# Altium PCB LittleWing++.PcbDoc (part 1 of 2)
Units mil, origin at the board's own origin, x right, y up, seen from the top; angles counter-clockwise.
Board outline 4200 x 2200 mil, 6 copper layers (L1 - Signal, L2 - Ground, L3 - Power, L4 - Signal, L5 - Ground, L6 - Signal), stack 60.567 mil thick; 70 components, 84 nets, 372 pads, 438 vias.
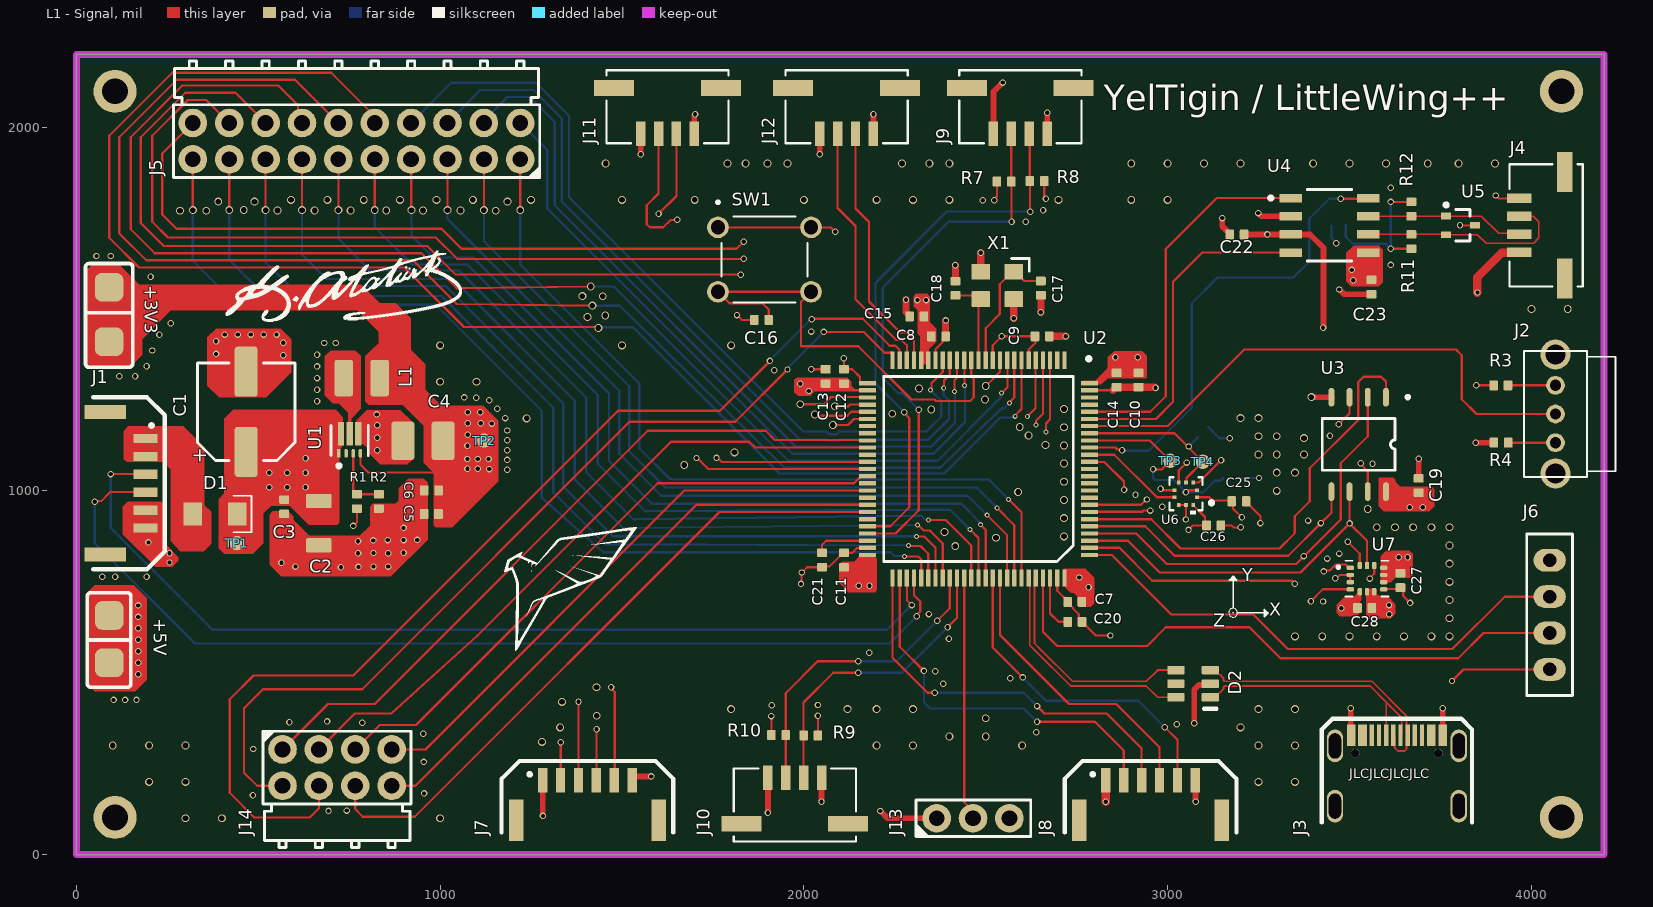
[diagram p0: L1 - Signal view]
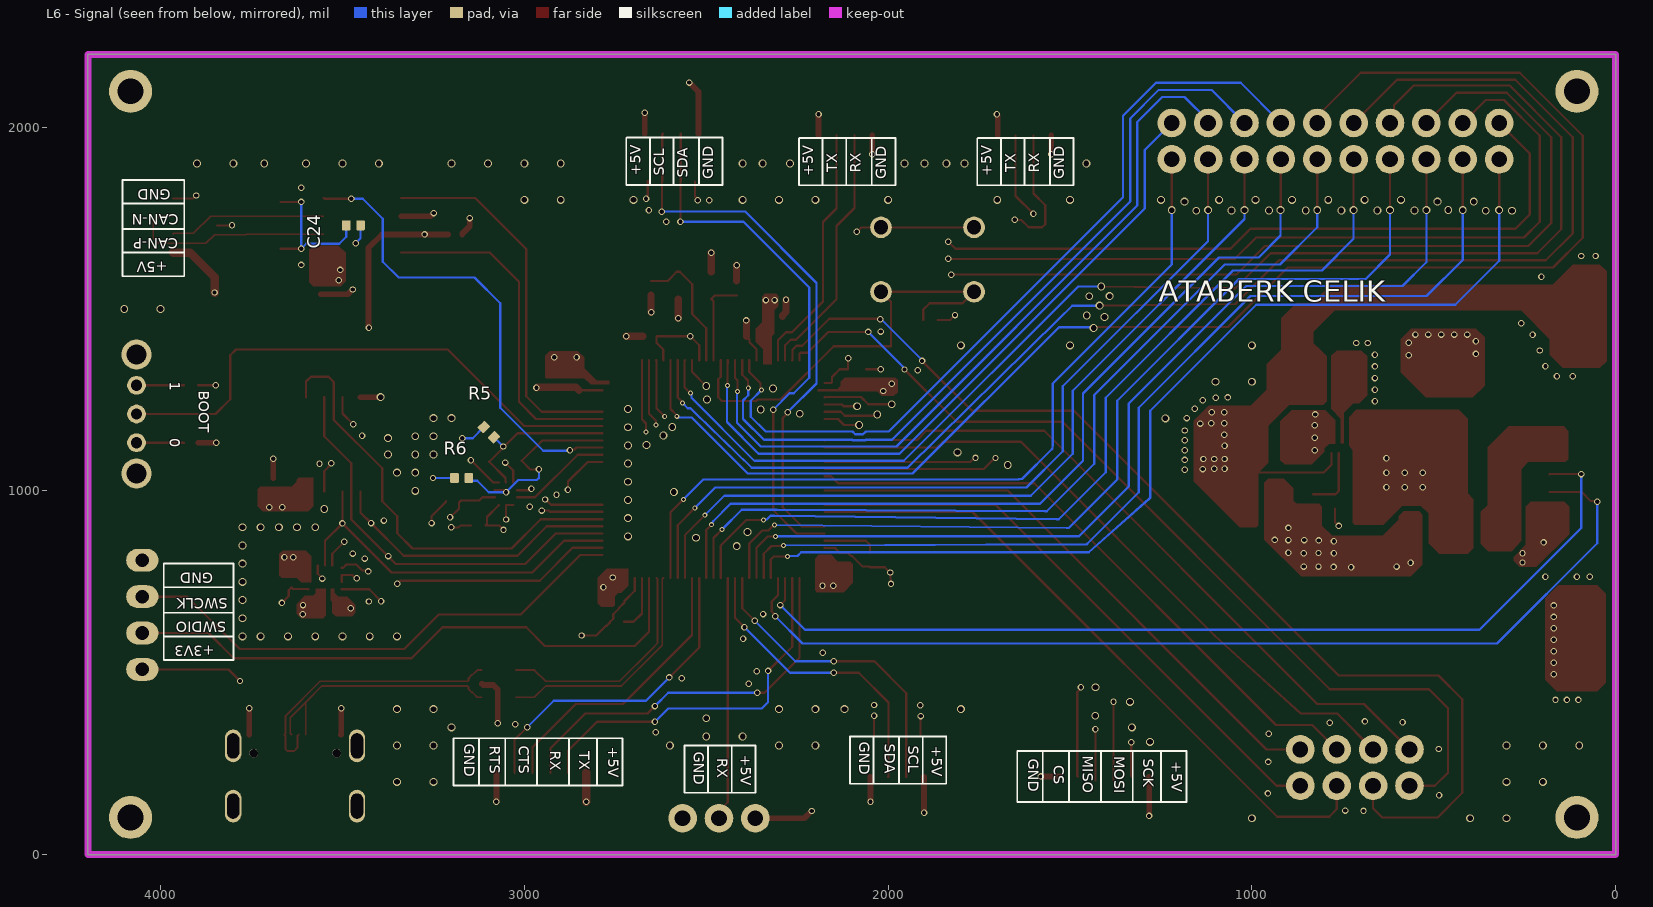
[diagram p1: L6 - Signal view, seen from below]
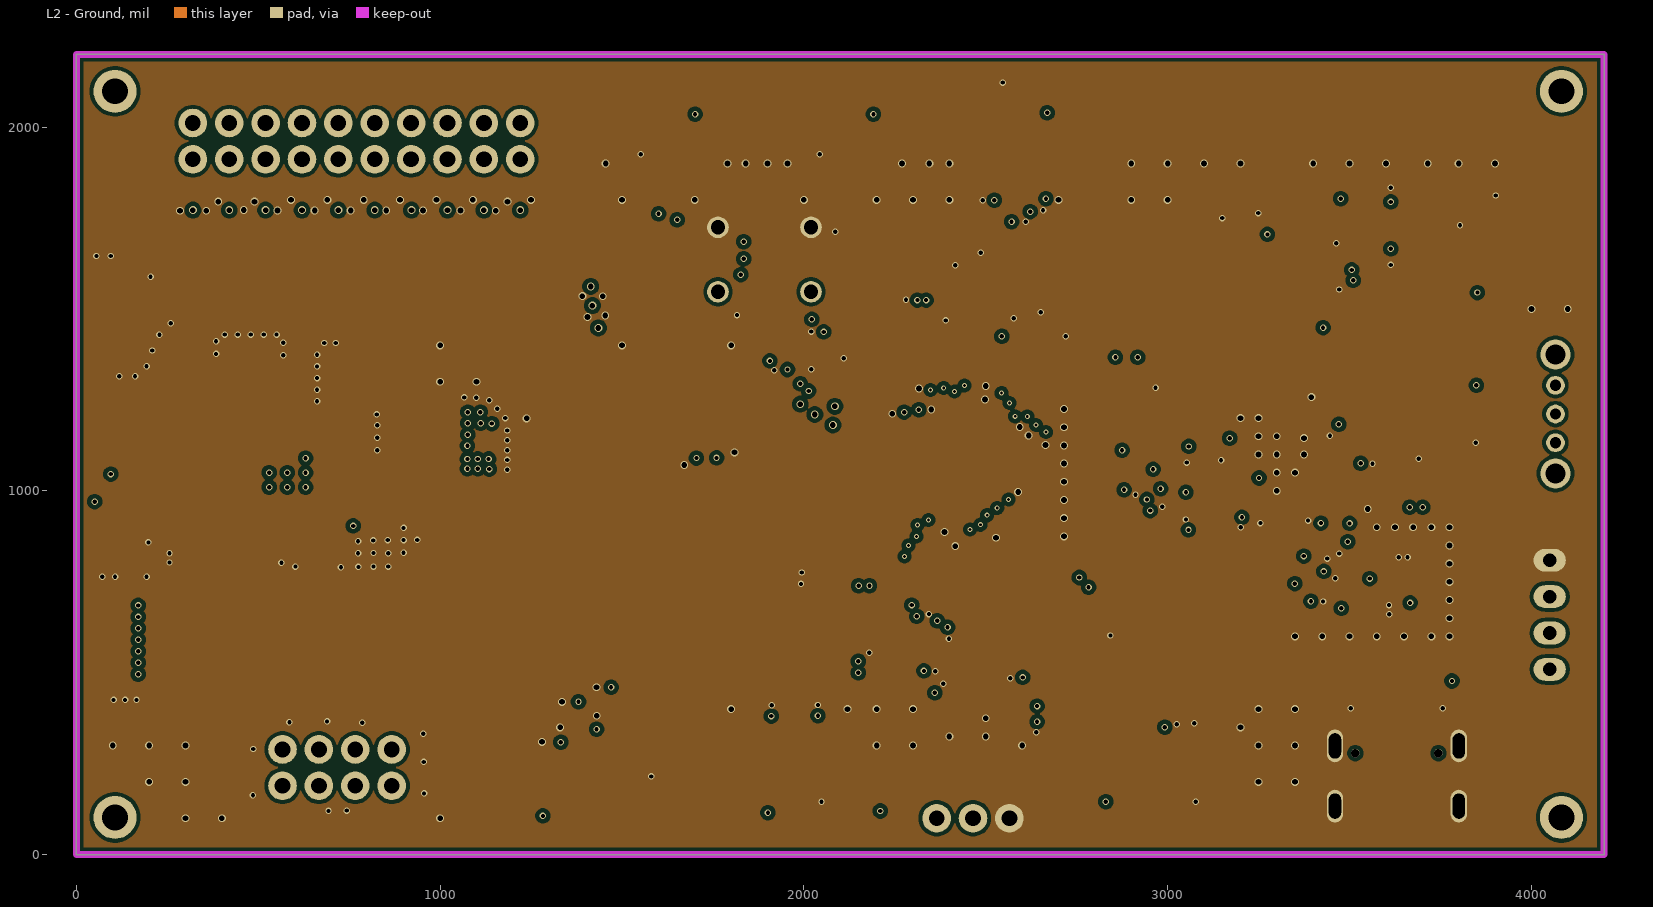
[diagram p2: L2 - Ground]
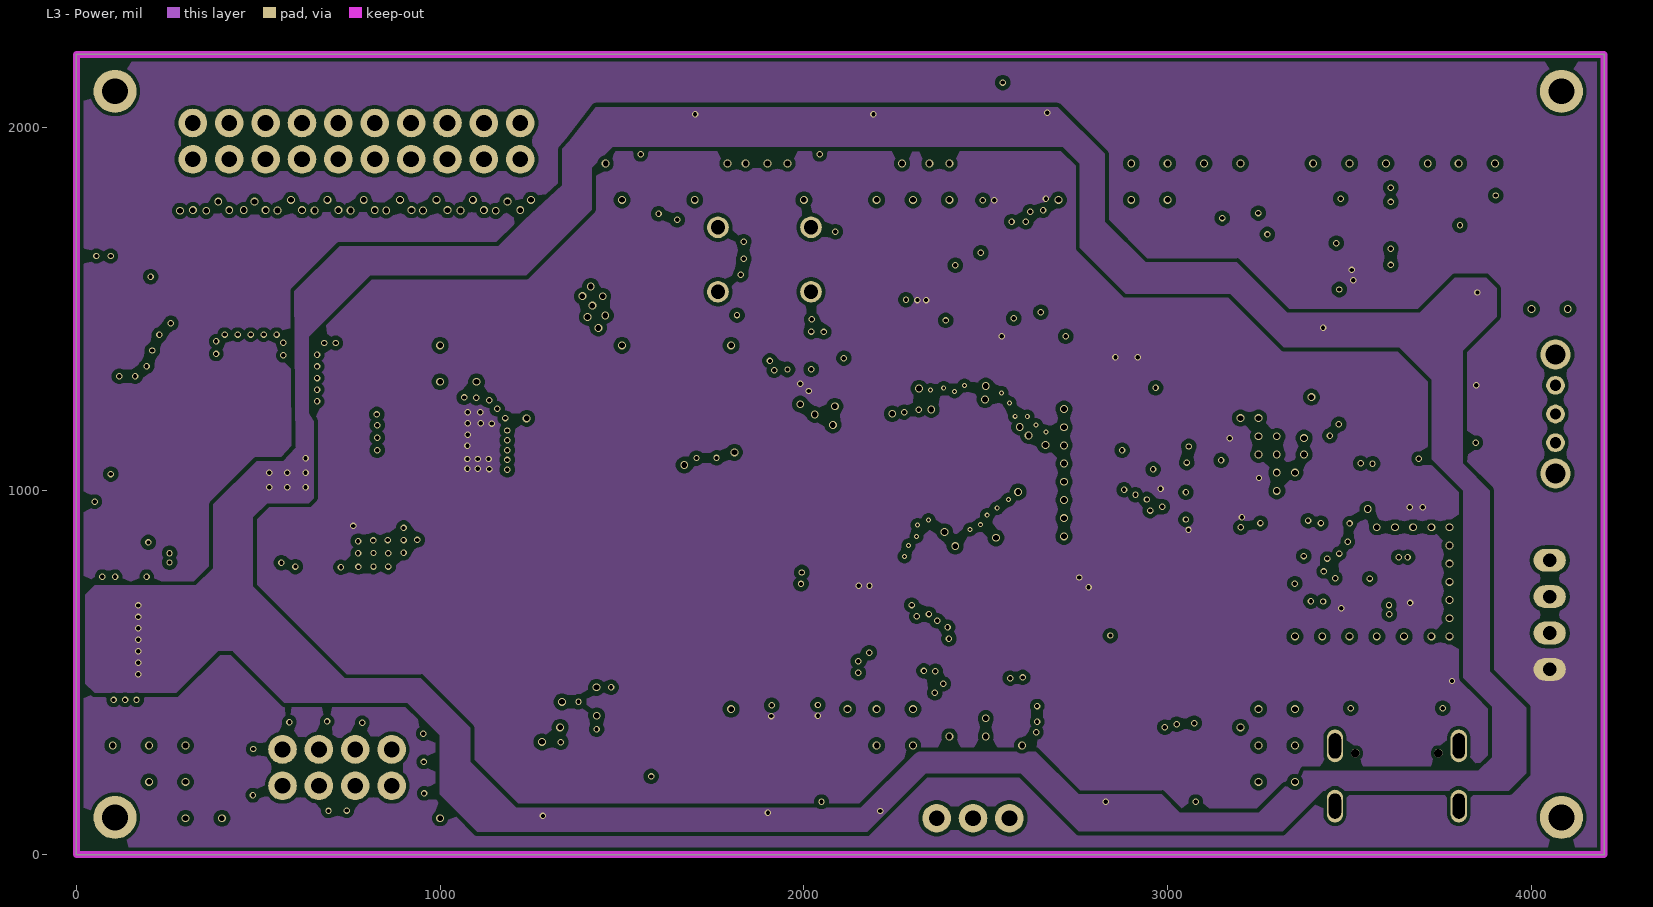
[diagram p3: L3 - Power]
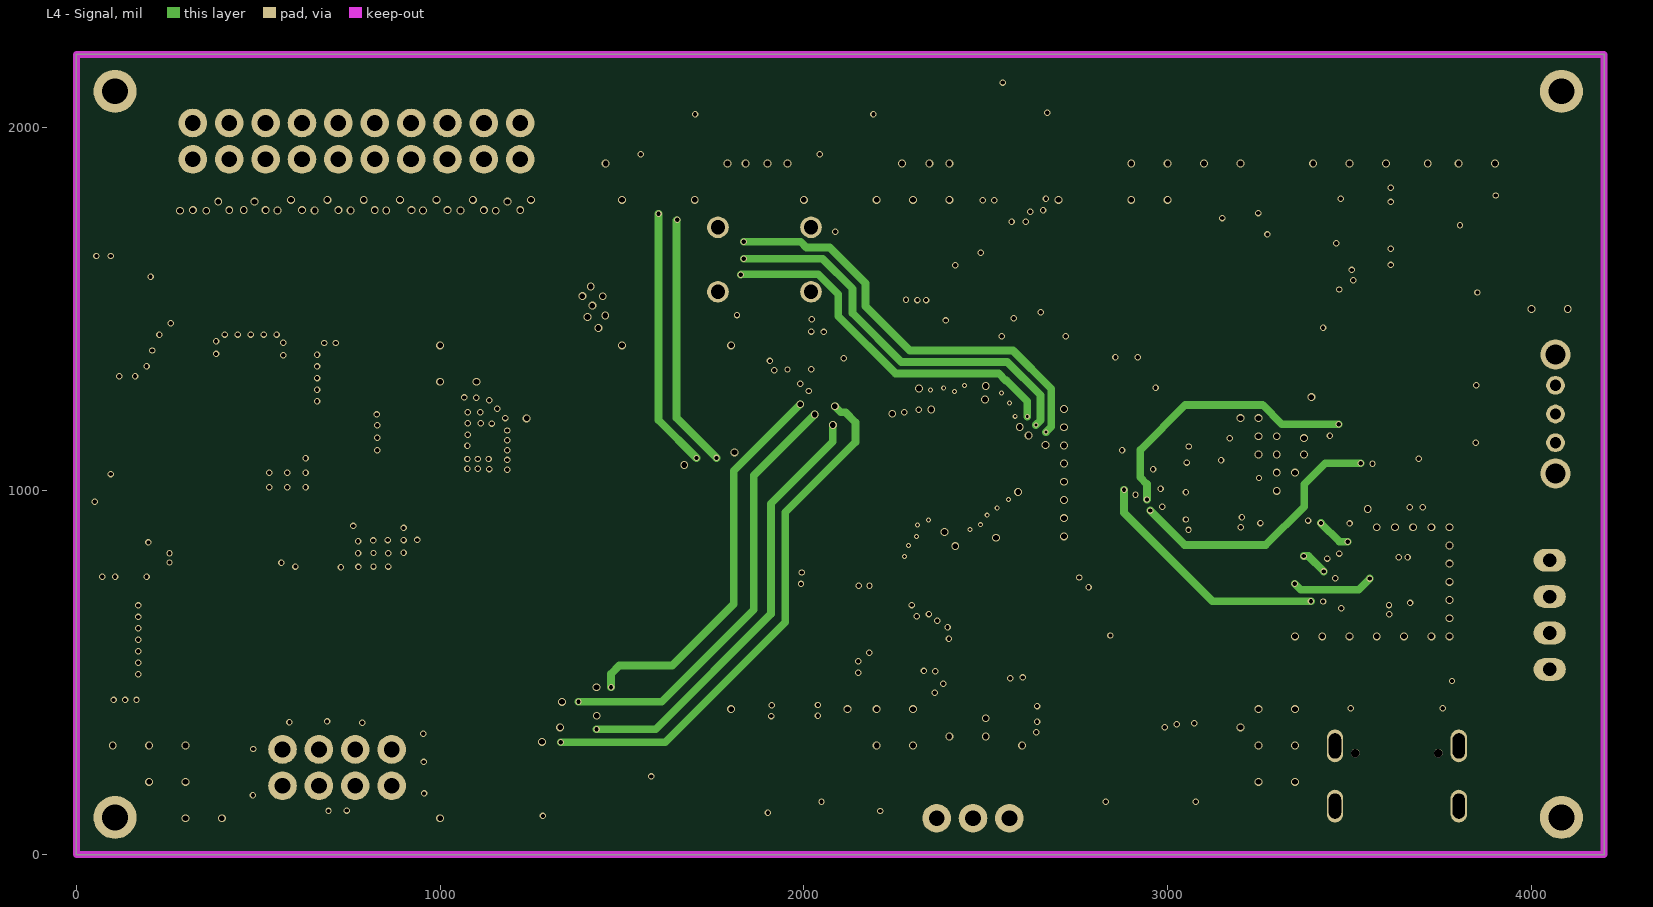
[diagram p4: L4 - Signal]
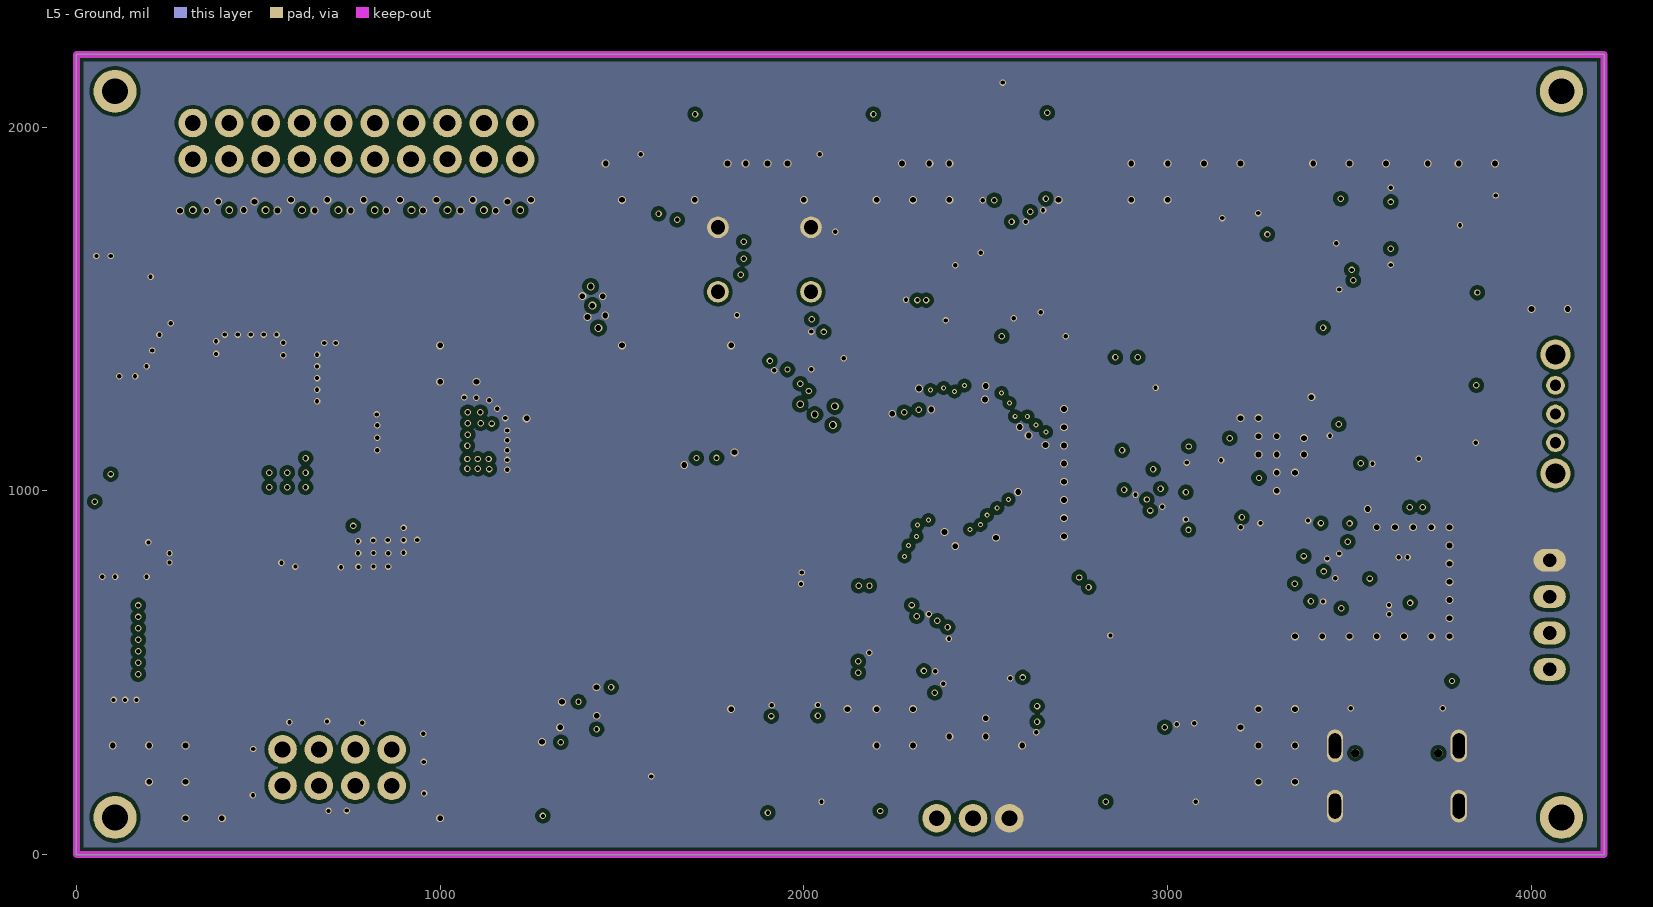
[diagram p5: L5 - Ground]
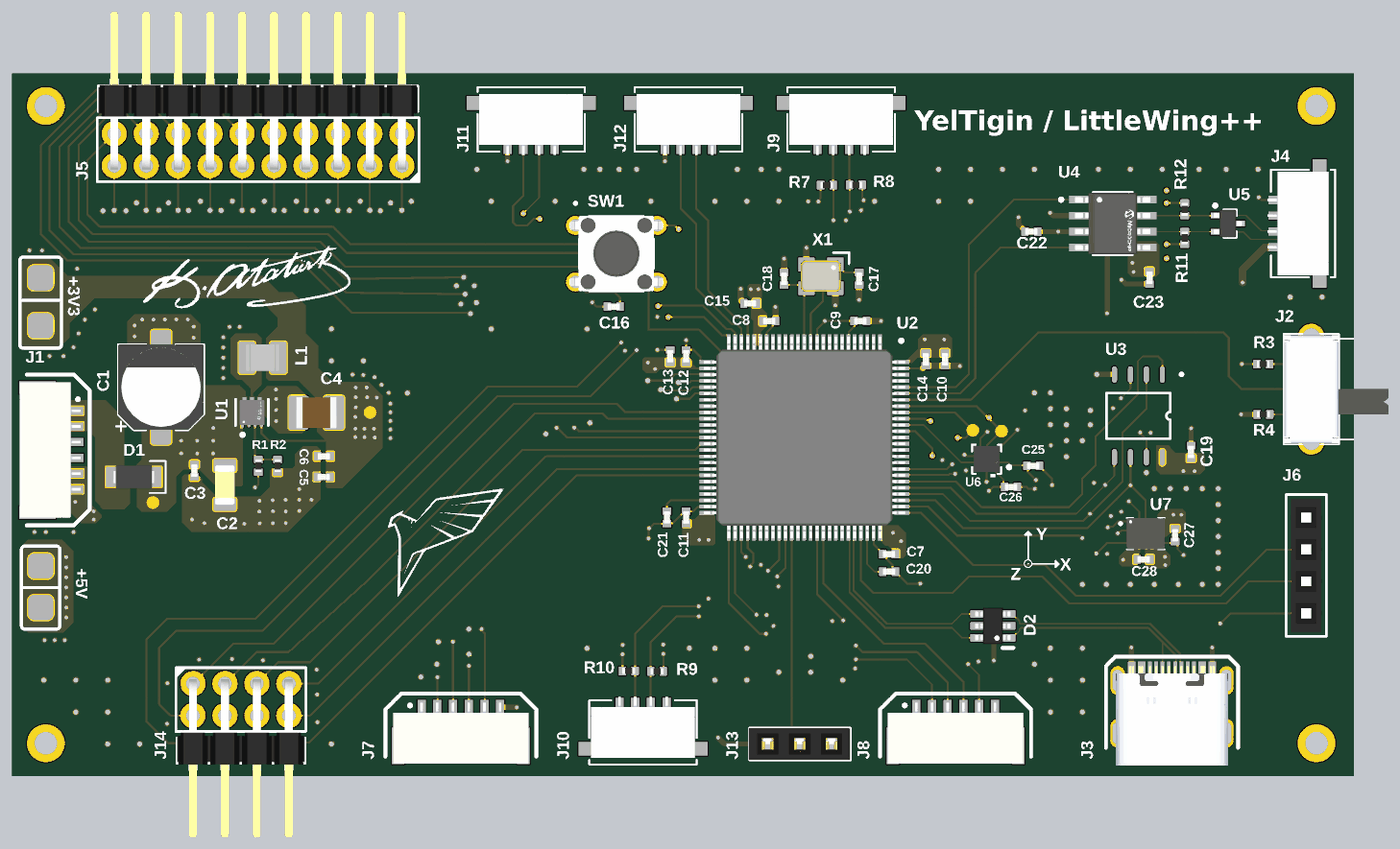
[diagram p7: 3D render of the assembled board from above, using the file's embedded part models]
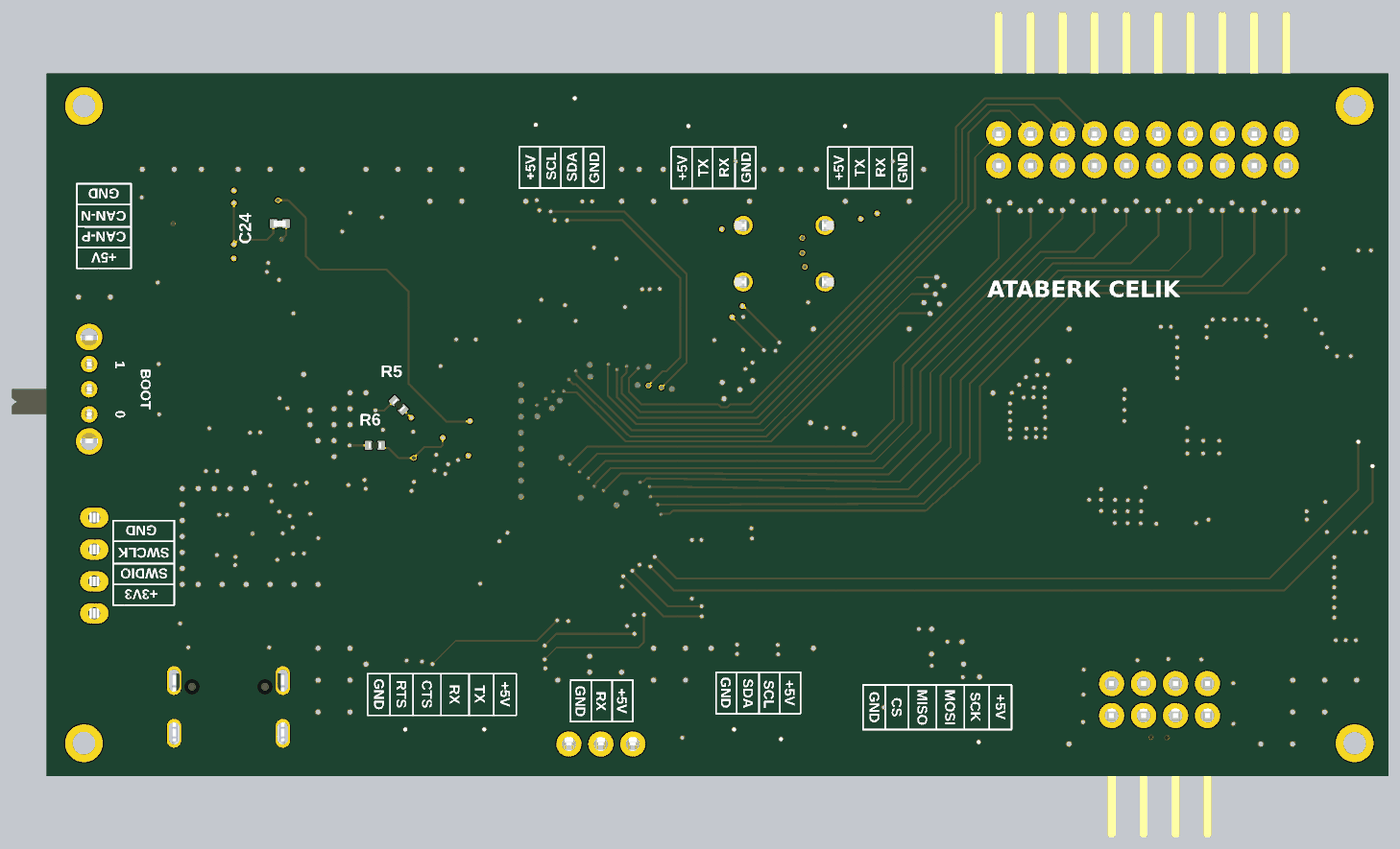
[diagram p8: 3D render of the assembled board from below, using the file's embedded part models]

## Layer stack, top to bottom
Top Solder: solder mask 0.4, Solder Resist, Dk 3.5
L1 - Signal: signal copper 1.378
Dielectric 2: prepreg 3.9134, PP-017, Dk 3.7
L2 - Ground: signal copper 0.5984
Dielectric 4: core 21.6535, PP-006, Dk 4.1
L3 - Power: signal copper 0.5984
Dielectric 1: prepreg 4.2835, PP-016, Dk 4.3
L4 - Signal: signal copper 0.5984
Dielectric 5: core 21.6535, PP-006, Dk 4.1
L5 - Ground: signal copper 0.5984
Dielectric 3: prepreg 3.9134, PP-017, Dk 3.7
L6 - Signal: signal copper 1.378
Bottom Solder: solder mask 0.4, Solder Resist, Dk 3.5

## Board outline
0,0 0,2200 4200,2200 4200,0

## Design rules (kind name [scope] priority, off if disabled: settings)
Clearance [HasFootprint('LQFP100')] p1: gap=1 ignorepadtopadclearanceinfootprint=TRUE
Clearance ClearanceDiffUSB [InNet('USBD_N') or InNet('USBD_P') or InNet('USB_CONN_N') or InNet('USB_CONN_P') vs InNet('USBD_N') or InNet('USBD_P') or InNet('USB_CONN_N') or InNet('USB_CONN_P')] p2: gap=7.87 ignorepadtopadclearanceinfootprint=TRUE
Clearance Clearance_1 [All] p3: gap=10 ignorepadtopadclearanceinfootprint=TRUE except(4: Arc-Arc Arc-Track Track-Track; 5.91: SMDPad-SMDPad; 7.87: Arc-SMDPad Arc-THPad Track-SMDPad Track-THPad SMDPad-Text THPad-Text Via-Text; 11.81: Arc-Via Track-Via Via-Fill Via-Poly Via-Region Fill-Fill Fill-Poly Fill-Region Poly-Poly Poly-Region Region-Region)
DiffPairsRouting DiffPairUSB [InNet('USBD_N') or InNet('USBD_P') or InNet('USB_CONN_N') or InNet('USB_CONN_P')] p1: maxlimit=8 minlimit=7.87 mostfreqgap=5 toplayer_prefgap=8 toplayer_minwidth=4.88 toplayer_maxwidth=4.88 toplayer_prefwidth=4.88 bottomlayer_prefgap=8 bottomlayer_minwidth=4.88 bottomlayer_maxwidth=4.88 bottomlayer_prefwidth=4.88 impedanceprofiledriven=TRUE impedanceprofileid={B7DB27C2-4DD3-4B97-A90A-0400BEAD07C5} impedanceprofilevalue=100.000000 maxuncoupledlength=500
DiffPairsRouting DiffPairsCAN [InNet('CAN_P') or InNet('CAN_N')] p2: maxlimit=5 minlimit=5 mostfreqgap=5 toplayer_minwidth=2.99 toplayer_maxwidth=7.87 toplayer_prefwidth=2.99 bottomlayer_minwidth=2.99 bottomlayer_maxwidth=2.99 bottomlayer_prefwidth=2.99 impedanceprofiledriven=TRUE impedanceprofileid={3BD38CEE-BBBB-4D38-A1B5-1D460A52F470} impedanceprofilevalue=120.000000 maxuncoupledlength=500
HoleSize [All] p1: absolutevalues=TRUE maxlimit=248.03 minlimit=5.91 maxpercent=80.000 minpercent=20.000
HoleToHoleClearance [All] p1: gap=9.84 allowstackedmicrovias=TRUE
PlaneConnect [All] p1: planeconnectstyle=Direct reliefexpansion=20 reliefentries=4 reliefconductorwidth=10 reliefairgap=10
PolygonConnect [All] p1: connectstyle=Direct reliefconductorwidth=10 reliefentries=4 polygonreliefangle="90 Angle" airgapwidth=10
RoutingVias [All] p1: holewidth=11.81 width=17.72 viastyle="Through Hole" minholewidth=7.87 minwidth=9.84 maxholewidth=23.62 maxwidth=31.5
SolderMaskExpansion [All] p1: expansion=4 istentingtop=FALSE
SupplyNets "Schematic Supply Nets_3" [InNet('+5VNFILT')] p1: voltage=0.000
SupplyNets "Schematic Supply Nets_2" [InNet('GND')] p2: voltage=0.000
SupplyNets "Schematic Supply Nets_1" [InNet('+3V3')] p3: voltage=0.000
SupplyNets "Schematic Supply Nets" [InNet('+5V')] p4: voltage=0.000
Width Width_1 [InNet('+5V')] p1: maxlimit=35.43 minlimit=15.75 preferedwidth=31.5
Width Width_GND [InNet('GND')] p2: maxlimit=39.37 minlimit=3.94 preferedwidth=19.68
Width [All] p3: maxlimit=21.18 minlimit=6.16 preferedwidth=21.18 toplayer_maxwidth=6.16 toplayer_prefwidth=6.16 midlayer1_minwidth=21.18 midlayer2_minwidth=21.18 bottomlayer_maxwidth=6.16 bottomlayer_prefwidth=6.16 impedanceprofiledriven=TRUE impedanceprofileid={D9F5E17D-E1BE-4945-B330-06D7DDF18374} impedanceprofilevalue=50.000000 minimp=50.000000 maximp=50.000000 favimp=50.000000
26 further rules are at their usual default settings.

## Classes and differential pairs
component class Sensors: C25 C26 C27 C28 TP3 TP4 U6 U7
component class Power: C1 C2 C3 C4 C5 C6 D1 J1 L1 R1 R2 TP1 TP2 U1
component class MCU: C7 C8 C9 C10 C11 C12 C13 C14 C15 C16 C17 C18 C19 C20 C21 C22 C23 C24 D2 J2 J3 J4 R3 R4 R5 R6 R7 R8 R9 R10 R11 R12 SW1 U2 U3 U4 U5 X1
component class Connectors: J5 J6 J7 J8 J9 J10 J11 J12 J13 J14
differential pair USBD: +USBD_P -USBD_N
differential pair USB_CONN: +USB_CONN_P -USB_CONN_N
differential pair CAN: +CAN_P -CAN_N

## Components (designator, comment, footprint, x,y, rotation, side; value= is the part's Value field where it differs from the comment)
C1 "22u" CAP_AE_SMD_D6MM3_H5M55 466.73,1217.52 r90 top
C2 "10u" CAP_1206 666.38,911.38 r90 top
C3 "100n" CAP_0402 571.38,956.38 r90 top
C4 "22u" CAP_1210 952.95,1137.8 r0 top
C5 "100n" CAP_0402 975.75,936.38 r0 top
C6 "1u" CAP_0402 976.38,1001.38 r0 top
C7 "1u" CAP_0402 2744.69,695 r0 top
C8 "100n" CAP_0402 2370,1425 r180 top
C9 "100n" CAP_0402 2655,1425 r180 top
C10 "100n" CAP_0402 2920,1305 r90 top
C11 "100n" CAP_0402 2110,809.69 r270 top
C12 "100n" CAP_0402 2110,1314.69 r270 top
C13 "100n" CAP_0402 2060,1314.69 r270 top
C14 "100n" CAP_0402 2860,1304.68 r90 top
C15 "100n" CAP_0402 2310.31,1480 r0 top
C16 "100n" CAP_0402 1883.46,1470.04 r0 top
C17 "12p" CAP_0402 2651.42,1557.36 r90 top
C18 "12p" CAP_0402 2416.42,1557.05 r270 top
C19 "100n" CAP_0402 3690.16,1014.76 r270 top
C20 "2u2" CAP_0402 2745,640 r180 top
C21 "2u2" CAP_0402 2050,810 r90 top
C22 "100n" CAP_0402 3190.31,1705 r0 top
C23 "100n" CAP_0402 3560,1560.31 r90 top
C24 "4n7" CAP_0402 3470,1730 r0 bottom
C25 "100n" CAP_0402 3196.06,971.46 r180 top
C26 "100n" CAP_0402 3126.54,905.16 r180 top
C27 "100n" CAP_0402 3639.96,753.94 r270 top
C28 "100n" CAP_0402 3541.54,678.15 r180 top
D1 "SS34LW" SOD-123W 381.38,936.38 r0 top
D2 "USBLC6-2SC6" SOT-23-6 3070,470 r90 top
J1 "SM06B-GHS-TB" SM06B-GHS-TB 135.12,1020.87 r270 top
J2 "SK12D07VG4" SK12D07VG4 4066.22,1211.3 r90 top
J3 "TYPE-C-31-M-12" TYPE-C-31-M-12 3630.28,216.14 r0 top
J4 "SM04B-GHS-TB" CONN_SM04B-GHS-TB_JST#1 4040,1730 r90 top
J5 "M20-9741046" "HARWIN M20-9741045" 770.28,1961.42 r180 top
J6 "4-Pin Header" "4-Pin Header" 4051.39,657.25 r90 top
J7 "SM06B-GHS-TB" SM06B-GHS-TB 1405,149.28 r0 top
J8 "SM06B-GHS-TB" SM06B-GHS-TB 2953.03,149.28 r0 top
J9 "SM04B-GHS-TB" CONN_SM04B-GHS-TB_JST#2 2595,2055.55 r180 top
J10 "SM04B-GHS-TB" CONN_SM04B-GHS-TB_JST#2 1975,137.07 r0 top
J11 "SM04B-GHS-TB" CONN_SM04B-GHS-TB_JST#2 1625,2055.55 r180 top
J12 "SM04B-GHS-TB" CONN_SM04B-GHS-TB_JST#2 2117.32,2055.55 r180 top
J13 "M20-7820342" "HARWIN M20-7820345" 2465,100 r90 top
J14 "M20-9740442" "HARWIN M20-9740445" 716.73,239.17 r0 top
L1 "470n" IND_1008 784.65,1310.04 r0 top
R1 "100k" RES_0402 771.38,971.06 r270 top
R2 "32k" RES_0402 831.38,971.06 r90 top
R3 "10k" RES_0402 3915.91,1290.04 r0 top
R4 "10k" RES_0402 3916.54,1132.56 r0 top
R5 "4k7" RES_0402 3097.64,1161.42 r45 bottom
R6 "4k7" RES_0402 3172.44,1035.43 r0 bottom
R7 "4k7" RES_0402 2550.39,1850.39 r180 top
R8 "4k7" RES_0402 2640.94,1851.38 r0 top
R9 "4k7" RES_0402 2018.9,327.76 r0 top
R10 "4k7" RES_0402 1930.31,328.74 r180 top
R11 "60R" RES_0402 3670,1685.31 r90 top
R12 "60R" RES_0402 3670,1774.69 r270 top
SW1 "SW_Push" "4-PIN BUTTON" 1891.73,1635.83 r0 top
TP1 "TP_NOBOM" PAD_RND_1MM 441.38,856.38 r270 top
TP2 "TP_NOBOM" PAD_RND_1MM 1120.83,1138.35 r270 top
TP3 "TP_NOBOM" PAD_RND_1MM 3007.09,1082.68 r270 top
TP4 "TP_NOBOM" PAD_RND_1MM 3096.85,1080.16 r270 top
U1 "TPS62086RLTR" FP-RLT0007A-MFG 751.38,1138.66 r90 top
U2 "STM32H723VET6" LQFP100 2480,1060 r180 top
U3 "MX25L25645GM2I-08G" SOP8 3600.2,1257.48 r270 top
U4 "MCP2562FDT-E/SN" FP-C04-057-SN-MFG 3445,1730 r0 top
U5 "ESDCAN03-2BWY" SOT65P210X110-3N 3805,1730 r0 top
U6 "BMP390" "LGA 10-pin ball" 3050.39,992.13 r180 top
U7 "ICM-42688-P" "14 Lead LGA" 3548.03,758.86 r0 top
X1 "50MHz" XTAL_3225 2531.69,1564.76 r180 top

## Footprints (in the part's own frame and the unit in brackets; to place one, negate y for a bottom-side part, rotate by r counter-clockwise, add the part's x,y. Pads: shape width x height; smd on the part's side, far side on the other; paste and mask are expansions set on the pad)
"4-PIN BUTTON" [mm]
  round 1.508 hole 1: 1(-3.25,2.25) 1(3.25,2.25) 2(-3.25,-2.25) 2(3.25,-2.25)
  silkscreen extent -3.35,-3 3,4.1, body extent -3.95,-3 3.95,3, height 4.3
"4-Pin Header" [mm]
  oval 1.6x2.25 hole 0.95: 1(-3.759,0.025) 2(-1.219,0.025) 3(1.321,0.025) 4(3.861,0.025)
  silkscreen extent -5.59,-1.57 5.69,1.63, body extent -5.28,-1.18 5.38,1.23, height 8.51
"14 Lead LGA" [mm]
  rrect50% 0.5x0.3 smd paste+0 mask+0.04: 1(-1.165,0.75) 2(-1.165,0.25) 3(-1.165,-0.25) 4(-1.165,-0.75) 8(1.165,-0.75) 9(1.165,-0.25) 10(1.165,0.25) 11(1.165,0.75)
  rrect50% 0.3x0.5 smd paste+0 mask+0.04: 5(-0.5,-0.915) 7(0.5,-0.915) 12(0.5,0.915) 13(0,0.915) 14(-0.5,0.915)
  rrect50% 0.3x0.5 smd mask+0.04: 6(0,-0.915)
  silkscreen extent -2.1,-1.25 1.5,1.25, body extent -1.5,-1.25 1.5,1.25, height 0.97
CAP_0402 [mm]
  rrect25% 0.6x0.7 smd: 1(-0.5,0) 2(0.5,0)
  body extent -0.5,-0.26 0.5,0.26, height 0.37
CAP_1206 [mm]
  rrect25% 1x1.8 smd: 1(-1.55,0) 2(1.55,0)
  body extent -1.6,-0.8 1.6,0.8, height 0.94
CAP_1210 [mm]
  rrect25% 1.6x2.7 smd: 1(-1.4,0) 2(1.4,0)
  body extent -1.6,-1.25 1.6,1.25, height 2.5
CAP_AE_SMD_D6MM3_H5M55 [mm] "Aluminum Electrolytic Capacitor, Body 6.30x6.60x5.50mm, IPC Low Density"
  rrect25% 3.5x1.6 smd: 1(-2.8,0) 2(2.8,0)
  silkscreen extent -3.4,-3.4 3.4,3.4, body extent -3.4,-3.4 3.4,3.4, height 5.5
CONN_SM04B-GHS-TB_JST#1 [mil]
  rect 26x67 smd mask+1.57: 1(-73.82,73.85) 2(-24.61,73.85) 3(24.61,73.85) 4(73.82,73.85)
  rect 110x43 smd: 5(-146.65,-52.14) 6(146.65,-52.14)
  silkscreen extent -168,-101 168,100, body extent -162,-81 162,110, height 167
CONN_SM04B-GHS-TB_JST#2 [mil]
  rect 26x67 smd: 1(-73.82,73.85) 2(-24.61,73.85) 3(24.61,73.85) 4(73.82,73.85)
  rect 110x43 smd: 5(-146.65,-52.14) 6(146.65,-52.14)
  silkscreen extent -168,-101 168,100, body extent -162,-81 162,110, height 167
FP-C04-057-SN-MFG [mm]
  rect 1.55x0.6 smd paste+0 mask+0: 1(-2.7,1.905) 2(-2.7,0.635) 3(-2.7,-0.635) 4(-2.7,-1.905) 5(2.7,-1.905) 6(2.7,-0.635) 7(2.7,0.635) 8(2.7,1.905)
  silkscreen extent -4.22,-2.5 1.55,2.5, body extent -3.57,-2.75 3.57,2.75, height 0.25
FP-RLT0007A-MFG [mm]
  rect 0.6x0.25 smd paste-1000 mask-1000: 1(-0.9,0.75)
  rrect100% 0.6x0.25 smd paste-1000 mask-1000: 2(-0.9,0.25) 3(-0.9,-0.25) 4(-0.9,-0.75)
  rect 1.64x0.44 smd paste-1000 mask-1000: 5(0.45,-0.6) 6(0.45,0) 7(0.45,0.6)
  silkscreen extent -1.9,-1.3 1.05,1.3, body extent -1.3,-1.15 1.37,1.15, height 0.25
"HARWIN M20-7820345" [mm] "2.54mm DIL PC TAIL PIN HEADER ASSEMBLY"
  round 2 hole 1.1: 1(0,2.54) 2(0,0) 3(0,-2.54)
  silkscreen extent -1.27,-4.03 1.27,4, body extent -1.25,-4.01 1.25,4.01, height 8.5
"HARWIN M20-9740445" [mm] "2.54mm DIL PC TAIL PIN HEADER ASSEMBLY"
  round 2 hole 1.1: 1(-3.81,1.27) 2(-1.27,1.27) 3(1.27,1.27) 4(3.81,1.27) 5(3.81,-1.27) 6(1.27,-1.27) 7(-1.27,-1.27) 8(-3.81,-1.27)
  silkscreen extent -5.19,-5.59 5.17,2.57, body extent -5.08,-10.97 5.08,1.59, height 5
"HARWIN M20-9741045" [mm] "2.54mm DIL PC TAIL PIN HEADER ASSEMBLY"
  round 2 hole 1.1: 1(-11.43,1.27) 2(-8.89,1.27) 3(-6.35,1.27) 4(-3.81,1.27) 5(-1.27,1.27) 6(1.27,1.27) 7(3.81,1.27) 8(6.35,1.27) 9(8.89,1.27) 10(11.43,1.27) 11(11.43,-1.27) 12(8.89,-1.27) 13(6.35,-1.27) 14(3.81,-1.27) 15(1.27,-1.27) 16(-1.27,-1.27) 17(-3.81,-1.27) 18(-6.35,-1.27) 19(-8.89,-1.27) 20(-11.43,-1.27)
  silkscreen extent -12.81,-5.59 12.79,2.57, body extent -12.7,-10.97 12.7,1.59, height 5
IND_1008 [mm]
  rrect25% 1.3x2.54 smd: 1(-1.25,0) 2(1.25,0)
  body extent -1.3,-1.05 1.3,1.05, height 1.71
"LGA 10-pin ball" [mil]
  rect 11x10 smd paste+0 mask+0: 1(-31,9.84) 2(-31,-9.84) 6(31,-9.84) 7(31,9.84)
  rect 10x11 smd paste+0 mask+0: 3(-19.69,-31) 4(0,-31) 5(19.68,-31) 8(19.68,31) 9(0,31) 10(-19.69,31)
  silkscreen extent -75,-46 46,56, body extent -40,-41 41,41, height 32
LQFP100 [mm]
  rect 0.3x1.2 smd mask+0.04: 1(-6,-7.6) 2(-5.5,-7.6) 3(-5,-7.6) 4(-4.5,-7.6) 5(-4,-7.6) 6(-3.5,-7.6) 7(-3,-7.6) 8(-2.5,-7.6) 9(-2,-7.6) 10(-1.5,-7.6) 11(-1,-7.6) 12(-0.5,-7.6) 13(0,-7.6) 14(0.5,-7.6) 15(1,-7.6) 16(1.5,-7.6) 17(2,-7.6) 18(2.5,-7.6) 19(3,-7.6) 20(3.5,-7.6) 21(4,-7.6) 22(4.5,-7.6) 23(5,-7.6) 24(5.5,-7.6) 25(6,-7.6) 51(6,7.6) 52(5.5,7.6) 53(5,7.6) 54(4.5,7.6) 55(4,7.6) 56(3.5,7.6) 57(3,7.6) 58(2.5,7.6) 59(2,7.6) 60(1.5,7.6) 61(1,7.6) 62(0.5,7.6) 63(0,7.6) 64(-0.5,7.6) 65(-1,7.6) 66(-1.5,7.6) 67(-2,7.6) 68(-2.5,7.6) 69(-3,7.6) 70(-3.5,7.6) 71(-4,7.6) 72(-4.5,7.6) 73(-5,7.6) 74(-5.5,7.6) 75(-6,7.6)
  rect 1.2x0.3 smd mask+0.04: 26(7.75,-6) 27(7.75,-5.5) 28(7.75,-5) 29(7.75,-4.5) 30(7.75,-4) 31(7.75,-3.5) 32(7.75,-3) 33(7.75,-2.5) 34(7.75,-2) 35(7.75,-1.5) 36(7.75,-1) 37(7.75,-0.5) 38(7.75,0) 39(7.75,0.5) 40(7.75,1) 41(7.75,1.5) 42(7.75,2) 43(7.75,2.5) 44(7.75,3) 45(7.75,3.5) 46(7.75,4) 47(7.75,4.5) 48(7.75,5) 49(7.75,5.5) 50(7.75,6) 76(-7.75,6) 77(-7.75,5.5) 78(-7.75,5) 79(-7.75,4.5) 80(-7.75,4) 81(-7.75,3.5) 82(-7.75,3) 83(-7.75,2.5) 84(-7.75,2) 85(-7.75,1.5) 86(-7.75,1) 87(-7.75,0.5) 88(-7.75,0) 89(-7.75,-0.5) 90(-7.75,-1) 91(-7.75,-1.5) 92(-7.75,-2) 93(-7.75,-2.5) 94(-7.75,-3) 95(-7.75,-3.5) 96(-7.75,-4) 97(-7.75,-4.5) 98(-7.75,-5) 99(-7.75,-5.5) 100(-7.75,-6)
  silkscreen extent -7.83,-7.83 6.61,6.46, body extent -8,-8 8,8, height 1.5
PAD_RND_1MM [mm]
  round 1 smd paste-0.5 mask+0: 1(0,0)
RES_0402 [mm]
  rrect25% 0.6x0.7 smd: 1(-0.5,0) 2(0.5,0)
  body extent -0.5,-0.25 0.5,0.25, height 0.3
SK12D07VG4 [mm]
  round 1.308 hole 0.8: 1(-2,0) 2(2,0) COM(0,0)
  round 2.1 hole 1.4: M1(-4.15,0) M2(4.15,0)
  silkscreen extent -4.4,-4.2 4.4,2.2, body extent -4.3,-6.15 4.3,2.15, height 4.7
SM06B-GHS-TB [mm]
  rect 0.65x1.7 smd: 1(-3.125,1.4) 2(-1.875,1.4) 3(-0.625,1.4) 4(0.625,1.4) 5(1.875,1.4) 6(3.125,1.4)
  rect 1x2.9 smd: ""(-4.975,-1.4) ""(4.975,-1.4)
  silkscreen extent -6,-2.25 6,2.75, body extent -5.38,-2.8 5.38,2.05, height 4.26
SOD-123W [mm] "Molded Diode, 2-Leads, Body 2,75x1,80mm, IPC Medium Density"
  rect 1.3x1.6 smd: 1(-1.55,0) 2(1.55,0)
  silkscreen extent 1.27,-1.27 2.54,1.27, body extent -1.67,-0.95 1.67,0.95, height 1.02
SOP8 [mm]
  oval 1.31x0.41 smd: 1(0,0) 2(0,-1.27) 3(0,-2.54) 4(0,-3.81) 5(6.59,-3.81) 6(6.59,-2.54) 7(6.59,-1.27) 8(6.59,0)
  silkscreen extent -0.09,-4.44 5.1,1.62
SOT65P210X110-3N [mm] "SOT23, 3-Leads, Body 2,00x2,10mm, Pitch 0,65mm, IPC Medium Density"
  rect 0.7x0.46 smd: 1(-1,0.65) 2(-1,-0.65) 3(1,0)
  silkscreen extent -1.12,-1.1 0.67,1.55, body extent -1.3,-1.1 1.3,1.1, height 1.1
SOT-23-6 [mm]
  rrect25% 0.6x1.2 smd: 1(-0.95,-1.2) 2(0,-1.2) 3(0.95,-1.2) 4(0.95,1.2) 5(0,1.2) 6(-0.95,1.2)
  silkscreen extent -1.75,-1.63 -1.75,-0.76, body extent -1.45,-1.4 1.45,1.4, height 1.45
TYPE-C-31-M-12 [mm]
  rect 0.6x1.5 smd mask+0.07: A1B12(-3.2,2.85) B1A12(3.2,2.85)
  rect 0.6x1.5 smd mask+0.04: A4B9(-2.4,2.85) B4A9(2.4,2.85)
  rect 0.3x1.5 smd mask+0.04: A5(-1.25,2.85) A6(-0.25,2.85) A7(0.25,2.85) A8(1.25,2.85) B5(1.75,2.85) B6(0.75,2.85) B7(-0.75,2.85) B8(-1.75,2.85)
  round 0.6 hole 0.6 unplated mask+0.3: MH(-2.9,1.6) MH(2.9,1.6)
  oval 1.143x2.286 hole 0.848 slot 1.75 at 90 deg mask+0.05: SH(-4.325,2.1) SH(-4.325,-2.1) SH(4.325,-2.1) SH(4.325,2.1)
  silkscreen extent -5.25,-3.25 5.25,4, body extent -4.47,-4.65 4.47,3.25, height 3.32
XTAL_3225 [mm]
  rrect10% 1.3x1.1 smd: 1(-1.15,-0.95) 2(1.15,-0.95) 3(1.15,0.95) 4(-1.15,0.95)
  silkscreen extent -2.23,-1.89 -1,-1, body extent -1.6,-1.28 1.6,1.22, height 0.61

## Part data
C1: library part CAP_ALEL_6.3x5.5, "Capacitor SMD Aluminium Electrolytic 6.3mm Diameter 5.5mm Height"
C2: library part CAP_1206, "Capacitor SMD 1206"
C3 C5 C6 C7 C8 C9 C10 C11 C12 C13 C14 C15 C16 C17 C18 C19 C20 C21 C22 C23 C24 C25 C26 C27 C28: library part CAP_0402, "Capacitor SMD 0402"
C4: library part CAP_1210, "Capacitor SMD 1210"
D1: "3A, 40V - 200V Schottky Barrier Surface Mount Rectifier"
D2: "Low-Capacitance ESD Protection USB", Manufacturer=STMicroelectronics, Distributor Link=https://www.mouser.de/ProductDetail/STMicroelectronics/USBLC6-2SC6?qs=po45yt2pPpu%2FhNIlwQdTlg%3D%3D, Manufacturer Part Number=USBLC6-2SC6
J1 J7 J8: "Header Connector 6 Position 1.25MM Pitch SMD Horizontal JST GH", Manufacturer=JST, Manufacturer Part Number=SM06B-GHS-TB
J2: "Switch Slide ON ON SPDT Side Slide 0.3A 30VDC PC Pins Bracket Mount/Through Hole Bulk", Package=None, Check_prices=https://www.snapeda.com/parts/SK12D07VG4/C%2526K/view-part/?ref=eda, MF=C&K, MP=SK12D07VG4, SnapEDA_Link=https://www.snapeda.com/parts/SK12D07VG4/C%2526K/view-part/?ref=snap
J3: "USB Type C Connector Horizontal SMT", Manufacturer="Koren Hroparts", Manufacturer Part Number=TYPE-C-31-M-12
J4 J9 J10 J11 J12: "Connector Header Surface Mount, Right Angle 4 position 0.049 (1.25mm)", Package=None, Check_prices=https://www.snapeda.com/parts/SM04B-GHS-TB/JST/view-part/?ref=eda, MF="JST Sales", MP=SM04B-GHS-TB, SnapEDA_Link=https://www.snapeda.com/parts/SM04B-GHS-TB/JST/view-part/?ref=snap
J5: "CONN HEADER R/A 20POS 2.54MM", Current Rating (Amps)="3A per Contact", Manufacturer="Harwin Inc.", Material Flammability Rating="UL94 V-0", Operating Temperature="-40°C ~ 105°C", Supplier Part Number 1=M20-9741046-ND, Insulation Color=Black, ComponentLink1Description=Datasheet, ComponentLink1URL=https://cdn.harwin.com/pdfs/M20-974.pdf, ComponentLink2Description="DigiKey Link", ComponentLink2URL=http://digikey.com/product-detail/en/harwin-inc/M20-9741046/M20-9741046-ND/3920727, Connector Type="Header, Cuttable", Contact Finish - Mating=Tin, Contact Finish - Post=Tin, Contact Material=Brass, Contact Shape=Square, Contact Type="Male Pin", Fastening Type=Push-Pull, LastUpdated="21.09.2022 19:20:06", Lifecycle Status=Active, Minimum Order=1200, Mounting Type="Through Hole, Right Angle", Number of Positions=20, Number of Positions Loaded=All, Number of Rows=2, Packaging=Bulk, Part Number=M20-9741046, Part Status=Active, PartId=162, Price=0.31, Series=M20, Shrouding=Unshrouded, Style="Board to Board or Cable", Supplier 1=DigiKey, Termination=Solder, Insulation Material="Polyamide (PA6T), Nylon 6T"
J13: "CONN RCPT 3POS 0.1 GOLD PCB", Current Rating (Amps)=3A, Manufacturer="Harwin Inc.", Material Flammability Rating="UL94 V-0", Operating Temperature="-40°C ~ 105°C", Supplier Part Number 1=952-1783-ND, Insulation Color=Black, ComponentLink1Description=Datasheet, ComponentLink1URL=https://cdn.harwin.com/pdfs/Harwin_PC_Connectors_M20.pdf, ComponentLink2Description="DigiKey Link", ComponentLink2URL=https://www.digikey.com/en/products/detail/harwin-inc/M20-7820342/3727752, Connector Type=Receptacle, Contact Finish - Mating=Gold, Contact Finish - Post=Tin, Contact Finish Thickness - Mating=Flash, Contact Length - Post="0.118\" (3.00mm)", Contact Type="Female Socket", Fastening Type=Push-Pull, LastUpdated="21.09.2022 18:55:13", Lifecycle Status=Active, Mated Stacking Heights="11.04mm, 12.63mm", Minimum Order=1, Mounting Type="Through Hole", Number of Positions=3, Number of Positions Loaded=All, Number of Rows=1, Packaging=Tube, Part Number=M20-7820342, Part Status=Active, Pitch - Mating="0.100\" (2.54mm)", Price=0.42, Series=M20, Style="Board to Board or Cable", Supplier 1=DigiKey, Termination=Solder, Insulation Height="0.335\" (8.51mm)"
J14: "CONN HEADER R/A 8POS 2.54MM", Current Rating (Amps)="3A per Contact", Manufacturer="Harwin Inc.", Material Flammability Rating="UL94 V-0", Operating Temperature="-40°C ~ 105°C", Supplier Part Number 1=M20-9740442-ND, Insulation Color=Black, ComponentLink1Description=Datasheet, ComponentLink1URL=https://cdn.harwin.com/pdfs/M20-974.pdf, ComponentLink2Description="DigiKey Link", ComponentLink2URL=http://digikey.com/product-detail/en/harwin-inc/M20-9740442/M20-9740442-ND/3920714, Connector Type="Header, Cuttable", Contact Finish - Mating=Gold, Contact Finish - Post=Tin, Contact Material=Brass, Contact Shape=Square, Contact Type="Male Pin", Fastening Type=Push-Pull, LastUpdated="21.09.2022 19:17:53", Lifecycle Status=Active, Minimum Order=5000, Mounting Type="Through Hole, Right Angle", Number of Positions=8, Number of Positions Loaded=All, Number of Rows=2, Packaging=Bulk, Part Number=M20-9740442, Part Status=Active, PartId=157, Price=0.18, Series=M20, Shrouding=Unshrouded, Style="Board to Board or Cable", Supplier 1=DigiKey, Termination=Solder, Insulation Material="Polyamide (PA6T), Nylon 6T"
L1: library part IND_1008, "Inductor SMD 1008"
R1 R2 R3 R4 R5 R6 R7 R8 R9 R10 R11 R12: library part RES_0402, "Resistor SMD 0402"
SW1: library part "Push Switch"
TP1 TP2 TP3 TP4: library part TEST_POINT_RND_1MM, "Test Point Round 1mm (NO BOM)"
U1: library part CMP-04918-000186-1, "IC REG BUCK 3.3V 3A 7VSON-HR", Case/Package=VQFN, Max Operating Temperature=125°C, Max Output Current=3A, Max Input Voltage=6V, Min Operating Temperature=-40°C, Min Output Voltage=3.3V, Min Input Voltage=2.5V, Package Quantity=3000, Switching Frequency=2.4MHz, Efficiency=95%, Lead Free="Lead Free", Mount="Surface Mount", Number of Outputs=1, Number of Pins=7, Operating Supply Voltage=6V, Output Configuration=Positive, Output Current=3A, Output Type=Fixed, Output Voltage=3.3V, Packaging="Tape and Reel", Radiation Hardening=No, RoHS Compliant=Yes, Synchronous Rectifier=Yes
U2: "Arm® Cortex®-M7 32-bit 550 MHz MCU, up to 1 MB flash, 564 KB / RAM, Ethernet, USB, 3x FDCAN, Graphics, 2x 16-bit ADCs"
U3: library part MX25L25673GM2I-08G, "FLASH - NOR Memory IC 256Mbit SPI 120 MHz 8-SOP"
U4: library part CMP-06279-000005-1, "IC TRANSCEIVER 1/1 8SOIC", Case/Package=SOIC, Max Operating Temperature=125°C, Max Supply Voltage=5.5V, Min Operating Temperature=-40°C, Min Supply Voltage=4.5V, Operating Supply Current=70mA, Package Quantity=3300, Data Rate=8Mbps, Mount="Surface Mount", Number of Pins=8, Number of Transceivers=1, Packaging="Tape and Reel", Receiver Hysteresis=200mV, Weight=0.019048oz
U6: "Pressure Sensor 4.35 ~ 18.13PSI (30 ~ 125kPa) Absolute 10-WFLGA"
U7: "High Precision 6-Axis MEMS MotionTrackingTM Device"
X1: library part TSX-3225_24.0000MF15X-AC, "WURTH 830108207809", Manufacturer=Epson, Manufacturer Part Number="TSX-3225 24.0000MF15X-AC"

## Free pads (board coordinates)
  rrect50% 78.74x78.74 smd: 31(90.55,657.48) 32(90.55,527.56) 33(90,1560) 34(90,1410)
  round 118.11 hole 70.87: 35(4082.68,102.36) 36(106.3,102.36) 37(106.3,2098.43) 38(4082.68,2098.43)

## Via types
v1: diameter 17.72, hole 11.81, L1 - Signal to L6 - Signal, tented both sides, 240 vias
v2: diameter 21.65, hole 15.75, L1 - Signal to L6 - Signal, tented both sides, 158 vias
v3: diameter 17.72, hole 11.81, L1 - Signal to L6 - Signal, 20 vias
v4: diameter 13.78, hole 7.87, L1 - Signal to L6 - Signal, tented both sides, 20 vias

## Nets (pads, with @x,y where several pads share a name; then routed paths per layer and width w, separated by ;. In a path a pad name is that pad's centre, name@x,y a point inside that pad or via, vN(x,y) a via of type N, cw(c..) or ccw(c..) an arc to the next point about the centre after c; other vN are vias at no path point)
+3V3: C4.2 C5.2 C6.2 C7.2 C8.2 C9.2 C10.2 C11.2 C12.2 C13.2 C14.2 C15.2 C19.2 C23.2 C25.2 C26.2 C27.2 C28.2 J6.1 L1.2 pad.33 pad.34 R1.2 R3.1 R5.2 R6.2 R7.2 R8.2 R9.2 R10.2 TP2.1 U1.4 U2.6 U2.11 U2.20 U2.21 U2.27 U2.50 U2.75 U2.100 U3.8 U4.5 U6.1 U6.6 U6.10 U7.5 U7.8 | length 1641.2
  L1 - Signal w6.16: v1(761.02,903.54) 771.38,913.9 R1.2@771.38,951.38 ; U1.4@780.91,1103.23 780.91,1071.65 802.36,1050.2 993.31,1050.2 ; R10.2@1910.63,328.74 v1(1910.63,380.91) ; R9.2@2038.58,327.76 v1(2038.58,381.89) ; U2.11@2519.37,1359.21 2519.37,1400.08 v1(2544.29,1425) C9.2@2635.31,1425 2637.01,1423.31 2637.01,1407.48 2618.49,1388.97 2618.49,1359.91 U2.6@2617.8,1359.21 ; v1(2523.62,1799.21) 2523.62,1802.34 2530.71,1809.43 R7.2@2530.71,1850.39 ; R8.2@2660.63,1851.38 2660.63,1811 2665.35,1806.28 v1(2665.35,1803.15) ; v1(2980.51,1005.91) 2983.64,1005.91 2987.58,1001.97 U6.6@3019.39,1001.97 ; v1(3057.28,892.72) 3069.72,905.16 C26.2@3106.85,905.16 3102.53,909.48 3102.53,928.18 3070.08,960.63 U6.10@3070.08,961.13 ; U6.1@3081.39,982.28 3115.35,982.28 3124.21,973.43 3174.41,973.43 C25.2@3176.38,971.46 3179.71,968.12 3179.71,950.78 3203.37,927.13 v1(3204.29,927.13) ; U7.8@3593.9,729.33 3594.6,730.03 3635.74,730.03 C27.2@3639.96,734.25 3647.71,726.51 3647.71,710.76 v1(3666.54,691.93) ; v1(3781.69,477.36) 3813.58,509.25 J6.1@4050.39,509.25 ; v1@3848.62,1290.35 3848.94,1290.04 R3.1@3896.22,1290.04
  L6 - Signal w6.16: R5.2@3111.56,1175.34 3142.21,1144.68 v1(3170.47,1144.68) ; R6.2@3192.13,1035.43 v1(3251.18,1035.43)
  other v1: 3477.56,677.17 2782.68,735.24 2150.79,739.17 2180.31,739.17 2757.09,761.81 3665.55,954.72 3700.98,954.72 1135.04,1060.04 1075,1061.02 1103.54,1061.02 1075,1087.6 1103.54,1087.6 1133.07,1087.6 1075,1124.02 1075.98,1154.53 1141.93,1185.04 1075.98,1186.02 1111.42,1186.02 1075.98,1216.54 1110.43,1216.54 2012.99,1274.61 3848.78,1290.2 1990.35,1294.29 2856.5,1367.13 2917.52,1367.13 2312.2,1524.61 2335.83,1524.61 3510.04,1578.74 3506.1,1607.28
+5V: C1.1 C2.2 C3.2 C22.2 D1.2 J4.1 J7.1 J8.1 J9.1 J10.1 J11.1 J12.1 J13.1 pad.31 pad.32 TP1.1 U1.1 U1.7 U4.3 | length 1263.7
  L1 - Signal w15.75: v1(1282.68,106.3) 1282.32,106.65 1282.32,214.06 J7.1@1282.68,214.41 ; J11.1@1698.82,1976.7 1698.82,2032.93 1700.79,2034.9 v1(1700.79,2035.43) ; v1(1901.24,115.31) J10.1@1901.21,213.82 ; J12.1@2191.14,1977.33 v1(2191.14,2035.43) ; v1(2210,120) 2210.53,120 2230.53,100 J13.1@2365,100 ; J9.1@2668.82,1981.7 v1(2668.82,2039.37) ; C22.2@3210,1705 v1(3274.35,1705) U4.3@3338.7,1705 3391.65,1705 3428.35,1668.31 3428.35,1449.8 v1(3427.36,1448.82)
  L1 - Signal w23.62: v1(2829.92,145.67) 2830,145.75 J8.1@2830,225 ; v1(3851.57,1545.28) 3851.57,1587.6 3918.97,1654.99 3964.96,1654.99 J4.1@3966.15,1656.18
  other v1: 170,496.02 170,527.52 170,559.02 170,590.51 170,622.01 170,653.5 170,685 530,1010 580,1010 630,1010 530,1050 580,1050 630,1050 630,1090
+5VNFILT: D1.1 J1.1 J1.2
BOOT_SW_H: J2.2 R3.2 | length 130.6
  L1 - Signal w6.16: R3.2@3935.59,1290.04 J2.2@4066.22,1290.04
BOOT_SW_L: J2.1 R4.2 | length 130
  L1 - Signal w6.16: R4.2@3936.22,1132.56 J2.1@4066.22,1132.56
CAN_N: J4.3 R11.2 U4.6 U5.2 | length 590.2
  L1 - Signal w3.94: U4.6@3551.3,1705 R11.2@3670,1705 3765.04,1705 U5.2@3765.63,1704.41 3851.71,1704.41 3875.22,1680.9 4005.9,1680.9 4020.87,1695.87 4020.87,1739.17 4005.43,1754.61 J4.3@3966.15,1754.61
CAN_P: J4.2 R12.2 U4.7 U5.1 | length 435.9
  L1 - Signal w3.94: U4.7@3551.3,1755 R12.2@3670,1755 3765.04,1755 U5.1@3765.63,1755.59 3862.72,1755.59 3910.63,1707.68 3963.87,1707.68 J4.2@3966.15,1705.39
CAN_RXD: U2.95 U4.4 | length 936.3
  L1 - Signal w6.16: U2.95@2785.12,1197.8 2967.8,1197.8 3015,1245 3015,1575 3095,1655 U4.4@3338.7,1655
CAN_STBY: U2.91 U4.8 | length 1295.2
  L1 - Signal w6.16: U2.91@2785.12,1119.05 2856.82,1119.05 2861.86,1114.02 2872.59,1114.02 v3(2874.8,1111.81) ; v3(3475.59,1803.15) 3549.45,1803.15 U4.8@3551.3,1805
  L6 - Signal w6.16: v3(2874.8,1111.81) 2876.37,1110.24 2948.03,1110.24 3066.14,1228.35 3066.14,1515.75 3137.01,1586.61 3345.67,1586.61 3388.98,1629.92 3388.98,1748.03 3444.09,1803.15 v3(3475.59,1803.15)
CAN_TERM_COMM: C24.2 R11.1 R12.1 | length 407.3
  L1 - Signal w6.16: v3(3613.46,1794.37) R12.1@3670,1794.37 ; v3@3617.32,1665.35 3617.6,1665.63 R11.1@3670,1665.63
  L6 - Signal w6.16: C24.2@3489.69,1730 3489.69,1698.5 3509.06,1679.13 3599.69,1679.13 v3(3613.46,1665.35) v3(3613.46,1794.37)
CAN_TXD: U2.96 U4.1 | length 1034.2
  L1 - Signal w6.16: U2.96@2785.12,1217.48 2952.48,1217.48 2995,1260 2995,1665 3135,1805 U4.1@3338.7,1805
CURRENT_DATA: J1.3 U2.53 | length 2661.5
  L1 - Signal w6.16: v1(94.68,1046.26) 181.22,1046.26 J1.3@181.5,1045.98 ; U2.53@2283.15,760.79 2283.15,699.33 v1(2296.46,686.02)
  L6 - Signal w6.16: v1(94.68,1046.26) 94.68,897.64 374.21,618.11 2228.54,618.11 v1(2296.46,686.02)
FLASH_RST: U2.82 U3.7 | length 1001
  L1 - Signal w6.16: U2.82@2785.12,941.89 2785.82,942.59 2930.3,942.59 2933.67,945.95 v1(2951.87,945.95) ; v1(3530.71,1075.79) 3530.71,1073.7 3550.2,1054.21 U3.7@3550.2,998.03
  L4 - Signal w21.18: v1(2951.87,945.95) 3046.44,851.38 3269.88,851.38 3375.2,956.69 3375.2,1017.72 3433.27,1075.79 v1(3530.71,1075.79)
FLASH_WP: U2.83 U3.3 | length 1013.9
  L1 - Signal w6.16: U2.83@2785.12,961.58 2926.96,961.58 2941.65,976.26 v1(2942.98,976.26) ; v1(3470.67,1183.07) 3500.2,1212.6 U3.3@3500.2,1257.48
  L4 - Signal w21.18: v1(2942.98,976.26) 2943.08,976.35 2943.08,1018.73 2924.41,1037.4 2924.41,1112.2 3048.43,1236.22 3261.02,1236.22 3314.17,1183.07 v1(3470.67,1183.07)
GND: C1.2 C2.1 C3.1 C4.1 C5.1 C6.1 C7.1 C8.1 C9.1 C10.1 C11.1 C12.1 C13.1 C14.1 C15.1 C16.1 C17.1 C18.1 C19.1 C20.1 C21.1 C22.1 C23.1 C24.1 C25.1 C26.1 C27.1 C28.1 D2.2 J1.5 J1.6 J3.A1B12 J3.B1A12 J3.SH J4.4 J6.4 J7.6 J8.6 J9.4 J10.4 J11.4 J12.4 J13.3 R2.1 R4.1 SW1.1 U1.5 U2.10 U2.19 U2.26 U2.49 U2.74 U2.99 U3.4 U4.2 U5.3 U6.3 U6.5 U6.8 U6.9 U7.2 U7.3 U7.6 U7.7 U7.9 U7.10 U7.11 X1.2 X1.4 | length 3438.1
  L1 - Signal w5.91: SW1.1@1763.78,1724.41 2073.37,1724.41 2085.18,1712.6 v3(2086.61,1712.6) ; v1(1816.14,1483.27) 1829.37,1470.04 C16.1@1863.78,1470.04 ; v2(2500,1288) 2539.06,1327.05 U2.10@2539.06,1359.21 ; U6.8@3030.71,961.13 U6.9@3050.39,961.13 v1(3050.39,921.26) ; U6.5@3030.71,1023.13 3030.71,1056.1 v1(3052.36,1077.76) ; U6.3@3070.08,1023.13 3085.98,1023.13 v1(3146.85,1084) v1@3146.85,1084.65 ; C26.1@3146.22,905.16 3175.26,905.16 3180.81,899.61 v1(3200.98,899.61) ; C25.1@3215.75,971.46 3215.75,969.49 3255.12,930.12 v1(3255.12,911.42) ; v1(3460.63,759.84) 3463.83,759.84 3472.68,768.7 U7.2@3502.17,768.7 U7.3@3502.17,749.02 ; v1@3803.35,1730.32 v1(3803.66,1730) U5.3@3844.37,1730 ; v1(3901.77,1812.01) 3909.96,1803.82 J4.4@3966.15,1803.82
  L1 - Signal w6.14: v1(1992.13,744.09) 1993.21,745.18 1993.21,774.51 v1(1994.29,775.59) 2009.02,790.32 C21.1@2050,790.32 2051.43,791.74 2069.39,791.74 2098.28,820.63 2101.26,820.63 C11.1@2110,829.37 2132.99,829.37 2138.19,834.57 2138.19,835.1 2145.85,842.76 2174.17,842.76 U2.49@2174.88,843.46 ; v1(2020.16,1334.37) C13.1@2060,1334.37 ; v1(2110,1365) C12.1@2110,1334.37 2132.99,1334.37 2154.33,1313.03 2154.33,1299.05 2157.17,1296.22 U2.26@2174.88,1296.22 ; U2.19@2361.89,1359.21 2361.89,1389.47 2380.94,1408.52 2380.94,1416.26 C8.1@2389.69,1425 ; U2.74@2696.53,760.79 2696.53,725.43 2725,696.97 C7.1@2725,695 2725,693.03 2739.49,678.54 2739.49,677.54 2755.94,661.08 2755.94,648.74 C20.1@2764.69,640 2764.69,638.03 2773.43,629.29 2775.39,629.29 2802.32,602.36 v1(2842.72,602.36) ; U2.99@2785.12,1276.53 C14.1@2849.57,1276.53
  L1 - Signal w15.75: J7.6@1528.03,215.12 1528.15,215 v1(1580,215) ; v1(1551.18,1925.2) J11.4@1551.18,1976.7 ; v1(2043.31,1925.2) J12.4@2043.31,1977.14 ; v1(2048.43,145.67) 2048.62,145.87 2048.62,213.65 J10.4@2048.82,213.85 ; J9.4@2521.18,1981.7 2521.18,2097 v1(2546.71,2122.52) ; v1(3073.03,361.22) 3073.03,453.74 3085.35,466.06 3113.31,466.06 D2.2@3117.24,470 ; J8.6@3076.06,225 3076.59,224.47 3076.59,146.05 v1(3076.97,145.67) ; v1(3150,1750) 3150,1727.6 3170.63,1706.97 C22.1@3170.63,1705 ; v1(3249.21,1763.78) 3257.99,1755 U4.2@3338.7,1755 ; v2@3394.88,1257.87 3395.28,1257.48 U3.4@3450.2,1257.48 ; v1(3471.94,1553.62) 3472.47,1553.62 3485.47,1540.63 C23.1@3560,1540.63 ; v1@3503.15,399.61 3503.15,331.02 J3.A1B12@3504.29,329.88 ; C19.1@3690.16,1034.45 v1(3690.16,1088.58) ; v1(3756.1,402.56) 3756.26,402.4 J3.B1A12@3756.26,329.88 ; v1@3846.65,1132.87 v1(3846.97,1132.56) R4.1@3896.85,1132.56
  L1 - Signal w19.68: v1(2280.71,1525.59) 2280.71,1491.89 2290.63,1481.97 C15.1@2290.63,1480 ; C8.1@2389.69,1425 v1(2389.69,1468.5) ; C18.1@2416.42,1576.73 v1(2416.42,1620.08) ; X1.2@2486.42,1602.17 v1(2486.42,1654.53) ; v1(2576.97,1474.41) X1.4@2576.97,1527.36 ; v1(2651.42,1491.14) C17.1@2651.42,1537.68 ; C9.1@2674.69,1425 v1(2719.69,1425) ; C14.1@2849.57,1276.53 2858.03,1285 C14.1@2860,1285 2965.2,1285 v1(2966.73,1283.46)
  L6 - Signal w5.91: C24.1@3450.31,1730 3450.31,1694.57 v1(3463.78,1681.1)
  other v1: 693.11,120.08 743.31,121.06 485.43,163.39 955.91,168.31 954.92,254.92 486.42,290.35 953.94,332.68 2638.98,336.61 3024.8,358.27 785.63,362.2 585.83,364.17 689.17,366.14 3503.15,402.56 1911.61,410.43 2038.58,411.42 102.36,425.2 133.86,425.2 165.35,425.2 2383.07,469.49 2567.13,485.24 2361.42,503.94 2180,555.25 2398.82,593.5 3609.45,660.43 2343.7,661.42 3608.46,686.02 3427.36,695.87 70.87,763.78 106.3,763.78 192.91,763.78 727.23,789.88 775.45,790.87 602.23,791.85 816.79,791.85 857.15,791.85 256.1,803.15 563.84,802.68 3439.17,813.98 3635.04,817.91 3659.65,817.91 774.47,828.27 857.15,828.27 3471.65,827.76 256.1,828.74 816.79,829.25 899.47,830.24 198.03,858.27 774.47,861.73 815.81,863.7 856.16,864.68 899.47,864.68 937.2,865.16 899.47,898.15 3386.02,918.31 2985.43,956.69 2911.61,989.17 1184.6,1058.07 3563.19,1074.8 1184.6,1085.05 827.03,1111.72 1184.6,1112.02 1184.6,1139 827.03,1146.17 3446.06,1151.57 1184.6,1165.97 827.03,1180.62 1179.14,1200.2 826.04,1210.15 1156.69,1225.39 661.61,1246.06 1135.04,1249.02 1099.61,1255.91 1066.14,1256.89 661.61,1278.05 661.61,1310.04 118.11,1314.96 161.42,1314.96 1918.5,1331.69 661.61,1342.03 192.91,1342.52 569.15,1372.55 661.61,1374.02 384.11,1376.49 208.66,1385.83 681.3,1406.5 712.8,1406.5 569.15,1407 384.11,1410.94 228.35,1429.13 407.73,1429.64 443.41,1429.64 479.09,1429.64 514.77,1429.64 550.45,1429.64 2019.88,1437.99 259.84,1460.63 204.01,1588.78 55.12,1645.67 94.49,1645.67 2610.24,1740.16 2657.48,1771.65 2492.13,1799.21
  other v2: 300,100 400,100 1000,100 200,200 300,200 3250,200 3350,200 100,300 200,300 300,300 2200,300 2300,300 2600,300 3250,300 3350,300 1280,310 2400,325 2500,325 1330,350 3200,350 2500,375 1430.44,381.65 1800,400 2120,400 2200,400 2300,400 3250,400 3350,400 1335,420 1430,460 3350,600 3425,600 3500,600 3575,600 3650,600 3725,600 3775,600 3775,650 3775,700 3775,750 3775,800 2416,848 3775,850 2528,871 2715,875 2386.63,887 3575,900 3625,900 3675,900 3725,900 3775,900 2715,925 3550,950 2715,975 2589,997 3300,1000 2715,1025 3300,1050 3350,1050 1671,1071 2715,1075 3250,1100 3300,1100 3375,1100 1809,1106 2715,1125 2664,1126 3375,1145 3250,1150 3300,1150 2618,1152 2715,1175 2593.33,1175.85 1237.97,1199.47 3200,1200 3250,1200 2243,1212 2350,1224 2715,1225 2498,1251 3395.09,1257.59 2316.68,1281.59 1000,1300 1100,1300 1000,1400 1500,1400 1800,1400 1405,1478 1454,1482.28 4000,1500 4100,1500 1391,1535.23 1447,1535 285,1770 357,1770 1153,1770 553,1771 655,1771 754,1771 852,1771 953,1771 1056,1771 460,1772 390,1795 490,1795 1185,1795 590,1800 690,1800 790,1800 890,1800 990,1800 1090,1800 1250,1800 1500,1800 1700,1800 2000,1800 2200,1800 2300,1800 2400,1800 2700,1800 2900,1800 3000,1800 1455,1900 1790,1900 1840,1900 1900,1900 1955,1900 2270,1900 2345,1900 2400,1900 2900,1900 3000,1900 3100,1900 3200,1900 3400,1900 3500,1900 3600,1900 3715,1900 3800,1900 3900,1900
  other v3: 3613.46,1621.06 3613.46,1833.66
GPIO_1: J5.1 U2.69 | length 2232.6
  L1 - Signal w6.16: v2(1220.28,1771.65) J5.1@1220.28,1911.42 ; v4(2562.99,976.38) 2598.11,941.26 U2.69@2598.11,760.79
  L6 - Signal w6.16: v2(1220.28,1771.65) 1220.28,1622.24 1547.24,1295.28 1547.24,1131.5 ccw(c1647.24,1131.5) 1548.13,1118.21 ccw(c1554.23,1119.07) 1549.84,1114.75 1630.5,1034.09 ccw(c1634.82,1038.48) 1633.92,1032.39 ccw(c1647.24,1131.5) 1647.24,1031.5 2507.87,1031.5 v4(2562.99,976.38)
GPIO_2: J5.2 U2.68 | length 2255.7
  L1 - Signal w6.16: v2(1120.28,1771.65) J5.2@1120.28,1911.42 ; v4(2531.5,952.76) 2578.43,905.83 U2.68@2578.43,760.79
  L6 - Signal w6.16: v2(1120.28,1771.65) 1120.28,1686.81 1519.69,1287.4 1519.69,1109.19 1619.69,1009.19 2475.07,1009.19 v4(2531.5,952.76)
GPIO_3: J5.3 U2.67 | length 2281.4
  L1 - Signal w6.16: v2(1020.28,1771.65) J5.3@1020.28,1911.42 ; v4(2503.94,933.07) 2558.74,878.27 U2.67@2558.74,760.79
  L6 - Signal w6.16: v2(1020.28,1771.65) 1020.28,1747.44 1492.13,1275.59 1492.13,1102.36 1607.61,986.88 2450.13,986.88 v4(2503.94,933.07)
GPIO_4: J5.4 U2.64 | length 2367
  L1 - Signal w6.16: J5.4@920.28,1911.42 920.77,1910.93 920.77,1772.15 v2(921.26,1771.65) ; v4(2485.42,907) 2499.69,892.73 U2.64@2499.69,760.79
  L6 - Signal w6.16: v2(921.26,1771.65) 921.26,1701.77 981.3,1641.73 1090.55,1641.73 1464.57,1267.72 1464.57,1082.68 1582.68,964.57 2433.07,964.57 2481,916.64 2481,915.61 2485.42,911.19 v4(2485.42,907)